# Altium PCB PCB1.PcbDoc
Units mm, origin at the board's own origin, x right, y up, seen from the top; angles counter-clockwise.
Board outline 49.8 x 17.78 mm, 2 copper layers (Top Layer, Bottom Layer); 17 components, 18 nets, 76 pads, 9 vias.
Unrouted connection lines stored in the file: 1.
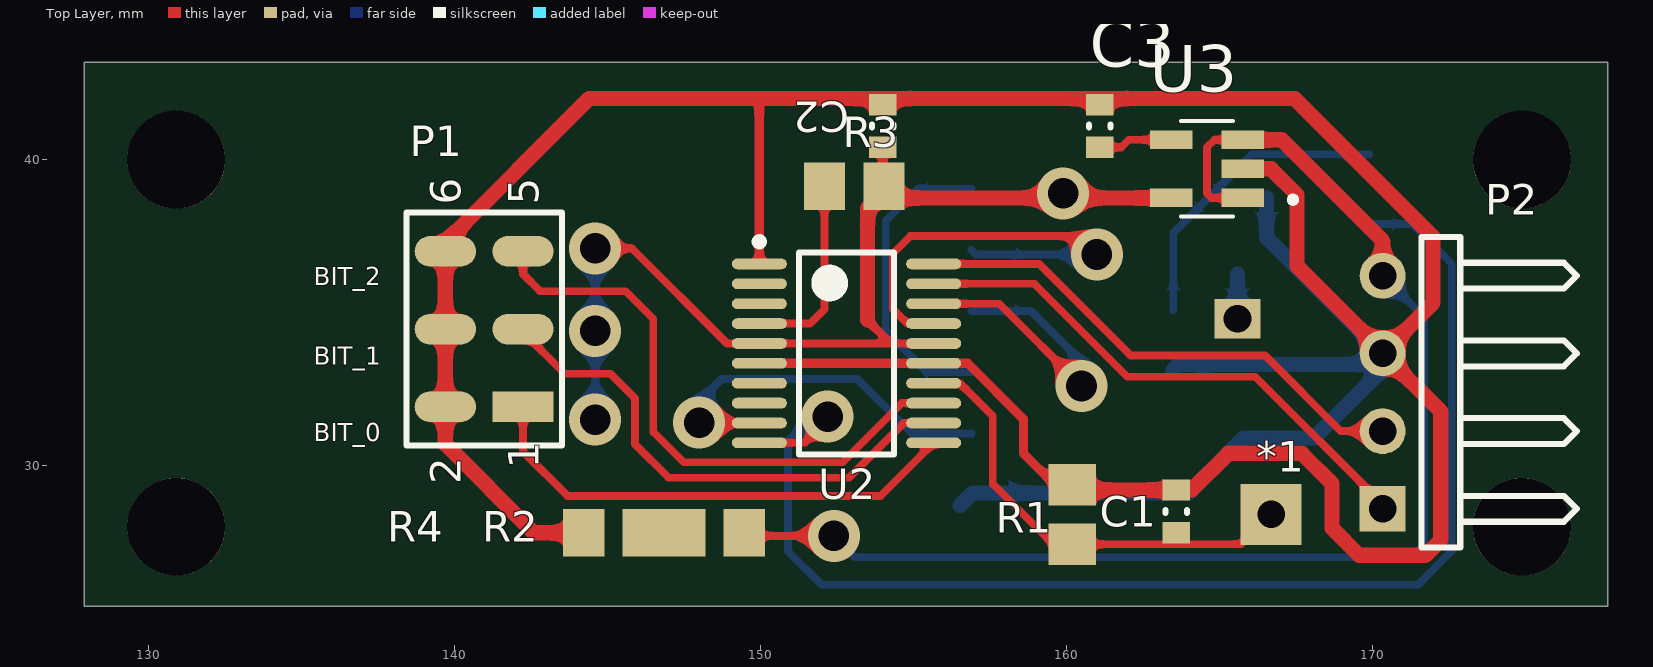
[diagram p0: Top Layer view]
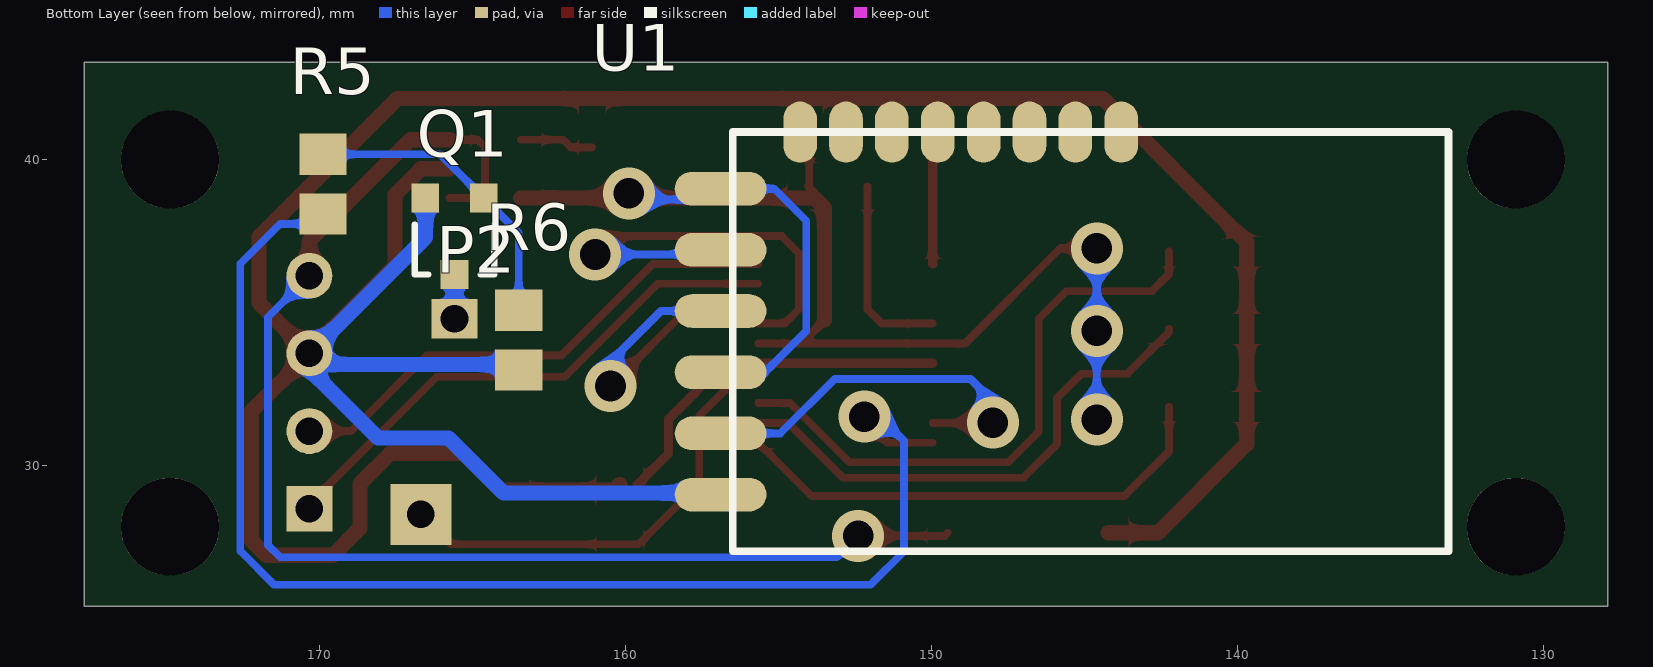
[diagram p1: Bottom Layer view, seen from below]

## Layer stack, top to bottom
Top Solder: solder mask 0.0102, Solder Resist, Dk 3.5
Top Layer: signal copper 0.0356
Dielectric 1: dielectric 0.32, FR-4, Dk 4.8
Bottom Layer: signal copper 0.0356
Bottom Solder: solder mask 0.0102, Solder Resist, Dk 3.5

## Board outline
127.9,25.4 127.9,43.18 177.7,43.18 177.7,25.4

## Design rules (kind name [scope] priority, off if disabled: settings)
Clearance GND [All vs InNet('GND')] p1: gap=0.3 ignorepadtopadclearanceinfootprint=FALSE
Clearance [All] p2: gap=0.254 ignorepadtopadclearanceinfootprint=FALSE except(0: Arc-Hole Track-Hole SMDPad-Hole THPad-Hole Via-Hole Fill-Hole Poly-Hole Region-Hole Text-Hole)
PolygonConnect [All] p1: connectstyle=Relief reliefconductorwidth=0.254 reliefentries=4 polygonreliefangle="90 Angle" airgapwidth=0.254
RoutingVias [All] p1: holewidth=0.6 width=1.2 viastyle="Through Hole" minholewidth=0.6 minwidth=1.2 maxholewidth=0.6 maxwidth=1.2
SolderMaskExpansion [All] p1: expansion=0.102
Width [All] p1: maxlimit=0.8 minlimit=0.254 preferedwidth=0.254
30 further rules are at their usual default settings.

## Classes and differential pairs
component class mishen: *1 C1 C2 C3 P1 P2 Q1 R1 R2 R3 R4 R5 R6 U1 U2 U3

## Components (designator, comment, footprint, x,y, rotation, side; value= is the part's Value field where it differs from the comment)
*1 "pin" pin#1 166.7,28.4 r0 top
C1 "0.2uf" CAPC0603(1608)100_L 163.6,28.5 r90 top
C2 "2.2uf" CAPC0603(1608)100_L 154,41.1 r270 top
C3 "470pF" CAPC0603(1608)100_L 161.1,41.1 r270 top
P1 "Header 3X2" HDR2X3 142.24,31.92 r90 top
P2 "pin" pin#2 165.6,34.8 r180 bottom
P2 "Header 4H" HDR1X4H 170.342,28.586 r90 top
Q1 "AO3400" AO-SOT23-3_V 165.6,37.5 r0 bottom
R1 "8k" RESC2013X70X40ML20T20 160.2,28.4 r270 top
R2 "100K" RESC2013X70X40ML20T20 148.5,27.8 r180 top
R3 "10K" RESC2013X70X40ML20T20 153.07,39.127 r180 top
R4 "30K" RESC2013X70X40ML20T20 145.2,27.8 r180 top
R5 "1K" RESC2013X70X40ML20T20 169.9,39.2 r270 bottom
R6 "10K" RESC2013X70X40ML20T20 163.5,34.1 r270 bottom
U1 "JDY_40" JDY_40 142.1,40.9 r270 bottom
U2 "STM32F030F4P6" STM-TSSOP20_N 152.816,33.666 r0 top
U3 "MIC5219-3.3YM5-TR" mic51 164.6,39.7 r180 top

## Footprints (in the part's own frame and the unit in brackets; to place one, negate y for a bottom-side part, rotate by r counter-clockwise, add the part's x,y. Pads: shape width x height; smd on the part's side, far side on the other; paste and mask are expansions set on the pad)
AO-SOT23-3_V [mm] "SOT23, 3-Leads, Body 3.016x2.8mm, Pitch 0.95mm"
  rect 0.9x0.95 smd: 1(-0.95,-1.25) 2(0.95,-1.25) 3(0,1.25)
  silkscreen extent -1.3,-0.38 1.3,1.25, body extent -1.14,-1.25 1.17,1.36, height 1.25
CAPC0603(1608)100_L [mm]
  rect 0.7x0.9 smd: 1(-0.7,0) 2(0.7,0)
  silkscreen extent -0.05,-0.35 0.05,0.35, body extent -0.87,-0.47 0.88,0.48, height 1
HDR1X4H [mm] "Connector; Header; 4 Position; Right Angle"
  rect 1.5x1.5 hole 0.9: 1(0,0)
  round 1.5 hole 0.9: 2(2.54,0) 3(5.08,0) 4(7.62,0)
  silkscreen extent -1.27,-6.35 8.89,-1.27
HDR2X3 [mm] "Connector; Header; 3x2 Position"
  rect 1x2 smd: 1(0,0)
  oval 1x2 smd: 2(0,2.54) 3(2.54,0) 4(2.54,2.54) 5(5.08,0) 6(5.08,2.54)
  silkscreen extent -1.27,-1.27 6.35,3.81
JDY_40 [mm]
  oval 2x1.1 smd: 1(0,-1.7) 2(0,-3.2) 3(0,-4.7) 4(0,-6.2) 5(0,-7.7) 6(0,-9.2) 7(0,-10.7) 8(0,-12.2)
  oval 1.1x3 smd: 9(1.85,-14.8) 10(3.85,-14.8) 11(5.85,-14.8) 12(7.85,-14.8) 13(9.85,-14.8) 14(11.85,-14.8)
  silkscreen extent 0,-14.4 13.7,9, body extent -0.07,-14.08 13.63,8.92, height 2.83
mic51 [mm]
  rect 1.39x0.6 smd: 1(-1.165,0.95) 2(-1.165,0) 3(-1.165,-0.95) 4(1.165,-0.95) 5(1.165,0.95)
  silkscreen extent -2.91,-1.56 0.85,1.56, body extent -1.5,-1.5 1.5,1.5, height 1.3
pin#1 [mm] "Molded Capacitor, 2-Leads, Body 3.20x1.60mm, IPC Medium Density"
  rect 2x2 hole 0.9: 0(0,0)
pin#2 [mm] "Molded Capacitor, 2-Leads, Body 3.20x1.60mm, IPC Medium Density"
  rect 1.5x1.3 hole 0.9: 0(0,0)
RESC2013X70X40ML20T20 [mm] "Chip Resistor, 2-Leads, Body 2.00x1.25mm, IPC Low Density"
  rect 1.35x1.55 smd: 1(-0.975,0) 2(0.975,0)
  body extent -1.1,-0.72 1.1,0.72, height 0.7
STM-TSSOP20_N [mm] "SOP, 20-Leads, Body 6.6x4.5mm, Pitch 0.65mm, IPC Medium Density"
  oval 1.8x0.35 smd: 1(-2.85,2.925) 2(-2.85,2.275) 3(-2.85,1.625) 4(-2.85,0.975) 5(-2.85,0.325) 6(-2.85,-0.325) 7(-2.85,-0.975) 8(-2.85,-1.625) 9(-2.85,-2.275) 10(-2.85,-2.925) 11(2.85,-2.925) 12(2.85,-2.275) 13(2.85,-1.625) 14(2.85,-0.975) 15(2.85,-0.325) 16(2.85,0.325) 17(2.85,0.975) 18(2.85,1.625) 19(2.85,2.275) 20(2.85,2.925)
  silkscreen extent -2.97,-3.3 1.55,3.77, body extent -2.25,-3.3 2.25,3.3, height 1.2

## Part data
C1 C2 C3: library part CMP-1590-00005-1, "0603 (1608 Metric) Chip Capacitor", Case-EIA=0603, Case-Metric=1608, PackageReference=CAPC0603(1608)100
P1: "Header, 3-Pin, Dual row", LatestRevisionDate=17-Jul-2002, LatestRevisionNote="Re-released for DXP Platform.", Publisher="Altium Limited"
P2: "Header, 4-Pin, Right Angle", LatestRevisionDate=17-Jul-2002, LatestRevisionNote="Re-released for DXP Platform.", Publisher="Altium Limited"
Q1: library part CMP-0278-00001-1, "N-channel Enhancement Mode Field-Effect Transistor; 5.8A/30V", Drain-Source Voltage Limit="30 V", Gate-Source Voltage Limit="+/-12 V", Junction Temperature="-55 to 150 degC", Manufacturer="Alpha and Omega", Channel Type=N, ComponentLink1Description="Manufacturer URL", ComponentLink1URL=http://www.aosmd.com/, ComponentLink2Description=Datasheet, ComponentLink2URL=http://www.aosmd.com/res/data_sheets/AO3400.pdf, ComponentLink3Description="Package Specification", ComponentLink3URL=http://www.aosmd.com/res/packaging_information/SOT-23.pdf, DatasheetVersion="Rev.8, 12/2011", Mounting Technology="Surface Mount", PackageDescription="3-Pin SOT23, 3.016 x 2.8 mm Body, 0.95 mm Pitch", PackageReference=SOT23, PartNumber=AO3400, Storage Temperature="-55 to 150 degC"
R1 R2 R3 R4 R5 R6: library part CMP-2001-04440-2, "RES SMD 150K OHM 1% 1/8W 0805", Case-EIA=0805, Manufacturer=Panasonic, Part Number=ERJ-6ENF1503V, Datasheet=http://industrial.panasonic.com/cdbs/www-data/pdf/RDA0000/AOA0000C86.pdf
U1: Package=None, Availability=Unavailable, MF="Advanced Monolithic Systems", MP=JDY_40, Price=None, SnapEDA_Link=https://www.snapeda.com/parts/AMS1117-5.0/Advanced%20Monolithic%20Systems/view-part/?ref=snap
U2: library part CMP-0304-00039-2, "ARM Cortex-M0 32-bit MCU, 16 KB Flash, 4 KB Internal RAM, 15 I/Os, 20-pin TSSOP, -40 to 85 degC, Tube", I/Os (High Current)=15, Operating Frequency(F) (Processor speed) (MHz)=48, Supply Voltage(Vcc) min (V)=2.4, ComponentLink1Description="Manufacturer URL", ComponentLink1URL=http://www.st.com/web/en/home.html, ComponentLink2Description=Datasheet, ComponentLink2URL=http://www.st.com/st-web-ui/static/active/en/resource/technical/document/datasheet/DM00088500.pdf, ComponentLink3Description="Package Specification", ComponentLink3URL=http://www.st.com/st-web-ui/static/active/en/resource/technical/document/datasheet/DM00065136.pdf, Core="ARM Cortex-M0", DatasheetVersion="Rev. 1", FLASH Size (Prog) (kB)=16, Internal RAM Size (kB)=4, Mounting Technology="Surface Mount", PackageDescription="20-Pin Thin Shrink Small Outline Package, 6.5 x 4.4 mm Body, 0.65 mm Pitch", PackageReference=TSSOP20, PackageVersion="Rev. 1, 11/2012", Packing=Tube, PartNumber=STM32F030F4P6
U3: "MIC5219 Series 500 mA 3.3 V Fixed Output Surface Mount LDO Regulator - SOT-23-5", Package="SOT-23 Microchip", Availability=Unavailable, MF=Microchip, MP=MIC5219-3.3YM5-TR, Price=None, SnapEDA_Link=https://www.snapeda.com/parts/MIC5219-3.3YM5-TR/Microchip/view-part/?ref=snap

## Free pads (board coordinates)
  round 3.2 hole 3.2: 1(130.9,28) 1(130.9,40) 1(174.9,28) 1(174.9,40)

## Via types
v1: diameter 1.7, hole 1, Top Layer to Bottom Layer, 9 vias

## Nets (pads, with @x,y where several pads share a name; then routed paths per layer and width w, separated by ;. In a path a pad name is that pad's centre, name@x,y a point inside that pad or via, vN(x,y) a via of type N, cw(c..) or ccw(c..) an arc to the next point about the centre after c; other vN are vias at no path point)
+3.3V: C2.2 R3.1 U1.9 U1.12 U2.5 U2.16 U3.5 | length 48.4
  Top Layer w0.254: v1(144.6,37.1) 145.8,37.1 148.909,33.991 U2.5 154.269,33.991 ; 153.5,34.76 154.269,33.991 ; R3.1@153.832,38.746 153.832,38.914 R3.1 154,39.172 C2.2 C2.2@154,40.6 ; U2.16 154.269,33.991
  Top Layer w0.5: 153.5,34.76 153.5,38.414 153.832,38.746 U3.5@163.435,38.746
  Bottom Layer w0.254: v1(144.6,31.5) v1(144.6,34.4) v1(144.6,37.1) ; U1.9@156.527,38.691 159.691,38.691 v1(159.9,38.9) ; U1.12 155.45,33.05 154.1,34.4 154.1,38 155.15,39.05 U1.9
+5V: P2.4 R2.1 U3.1 U3.3 | length 43.2
  Top Layer w0.254: R2.1 149.575,27.7 v1(152.4,27.7) ; U3.1 164.75,38.75 164.6,38.9 164.6,40.4 164.85,40.65 U3.3
  Top Layer w0.5: U3.3 167.05,40.65 170.342,37.358 P2.4
  Bottom Layer w0.254: v1(152.4,27.7) 153.1,27 171.3,27 171.7,27.4 171.7,34.848 P2.4
BIT_0: P1.1 U2.11 | length 16.2
  Top Layer w0.254: P1.1 142.24,30.46 143.698,29.002 145.077,29.002 145.079,29 153.925,29 U2.11
BIT_1: P1.3 U2.12 | length 17.1
  Top Layer w0.254: P1.3 142.24,34.36 143.6,33 145.1,33 145.9,32.2 145.9,30.7 147,29.6 152.9,29.6 154.691,31.391 U2.12
BIT_2: P1.5 U2.13 | length 19.7
  Top Layer w0.254: P1.5 142.24,36.26 142.8,35.7 145.6,35.7 146.5,34.8 146.5,31.1 147.492,30.108 152.69,30.108 154.623,32.041 U2.13
CS: U1.13 U2.9 | length 12.6
  Top Layer w0.254: v1(148,31.4) 148.8,31.4 148.809,31.391 U2.9
  Bottom Layer w0.254: v1(148,31.4) 148,32.1 148.731,32.831 153.169,32.831 154.95,31.05 U1.13
GND: C1.2 C2.1 C3.1 P1.2 P1.4 P1.6 P2.3 Q1.2 R1.1 R4.2 R6.2 U1.14 U2.1 U2.6 U2.15 U3.2 | length 130.6
  Top Layer w0.3: U2.6 U2.15 156.78,33.341 158.6,31.521 158.6,30.4 R1.1@159.625,29.375 ; U2.1 149.966,41.966
  Top Layer w0.5: R4.2 142.6,27.8 139.7,30.7 P1.2 P1.4 P1.6 139.7,37.3 144.4,42 150,42 ; 149.966,41.966 150,42 ; R1.1 160.375,29.2 C1.2 164.1,29.2 165.3,30.4 167.7,30.4 168.691,29.409 168.691,27.951 169.58,27.062 171.739,27.062 172.247,27.57 172.247,31.761 P2.3 ; U3.2 166.7,39.7 167.548,38.852 167.548,36.522 170.342,33.728 P2.3 ; 150,42 167.469,42 171.993,37.476 171.993,35.317 P2.3
  Bottom Layer w0.5: U1.14@156.527,28.691 156.936,29.1 164,29.1 165.8,30.9 168.104,30.9 170.342,33.138 P2.3 ; R6.2 163.675,33.3 169.976,33.3 P2.3 ; Q1.2 166.55,37.458 P2.3
LED_out: R5.2 U2.10 | length 43.4
  Top Layer w0.254: U2.10 151.441,30.741 152.3,31.6 v1(152.2,31.6)
  Bottom Layer w0.254: v1(152.2,31.6) 151.7,31.6 150.9,30.8 150.9,27.2 152,26.1 171.5,26.1 172.608,27.208 172.608,36.592 171.3,37.9 R5.2@169.8,37.9
NetC3_2: C3.2 U3.4 | length 2.4
  Top Layer w0.254: C3.2 161.8,40.4 162.05,40.65 U3.4
NetP2_0: P2.0 Q1.3 | length 1.5
  Bottom Layer w0.5: P2.0 Q1.3
NetQ1_1: Q1.1 R5.1 R6.1 | length 10
  Bottom Layer w0.254: R6.1 163.5,37.6 Q1.1 166.075,40.175 R5.1
NetR2_2: R2.2 R4.1 U2.8
NetR3_2: R3.2 U2.4 | length 6.3
  Top Layer w0.254: U2.4 151.632,34.641 152.095,35.104 R3.2
RX: U1.11 U2.18 | length 11
  Top Layer w0.254: U2.18 157.809,35.291 v1(160.5,32.6)
  Bottom Layer w0.254: U1.11 158.85,35.05 160.5,33.4 v1(160.5,32.6)
Sens_IN: *1.0 C1.1 R1.2 U2.14 | length 15.2
  Top Layer w0.254: U2.14 156.527,32.691 157.6,31.618 157.6,29.4 159.575,27.425 R1.2 165.725,27.425 *1.0@166.9,28.6
SWCLK: P2.2 U2.20 | length 16.9
  Top Layer w0.254: U2.20 159.109,36.591 162.1,33.6 166.5,33.6 168.974,31.126 P2.2
SWDIO: P2.1 U2.19 | length 17.8
  Top Layer w0.254: U2.19 158.959,35.941 162,32.9 166.183,32.9 170.342,28.741 P2.1
TX: U1.10 U2.17 | length 14.7
  Top Layer w0.254: U2.17 154.805,34.641 154.34,35.106 154.34,36.94 154.9,37.5 160.4,37.5 v1(161,36.9)
  Bottom Layer w0.254: U1.10 157.05,36.9 v1(161,36.9)
pads on no net: U1.1 U1.2 U1.3 U1.4 U1.5 U1.6 U1.7 U1.8 U2.2 U2.3 U2.7

## Silkscreen, mask and mechanical layers (free items; w line width, h text height)
Top Overlay:
  text "BIT_2" at 135.4,35.7 h1
  text "BIT_1" at 135.4,33.1 h1
  text "BIT_0" at 135.4,30.6 h1
bord:
  the board outline again, w0.2

## Text inside footprints (layer, text, board x,y; h text height)
P1: Top Overlay "6" at 140.208,38.524 h1 r90; Top Overlay "5" at 142.748,38.524 h1 r90; Top Overlay "2" at 140.208,29.38 h1 r90; Top Overlay "1" at 142.748,29.888 h1 r90